# EAGLE board pcbdesign(test) (EAGLE 9.3.1)
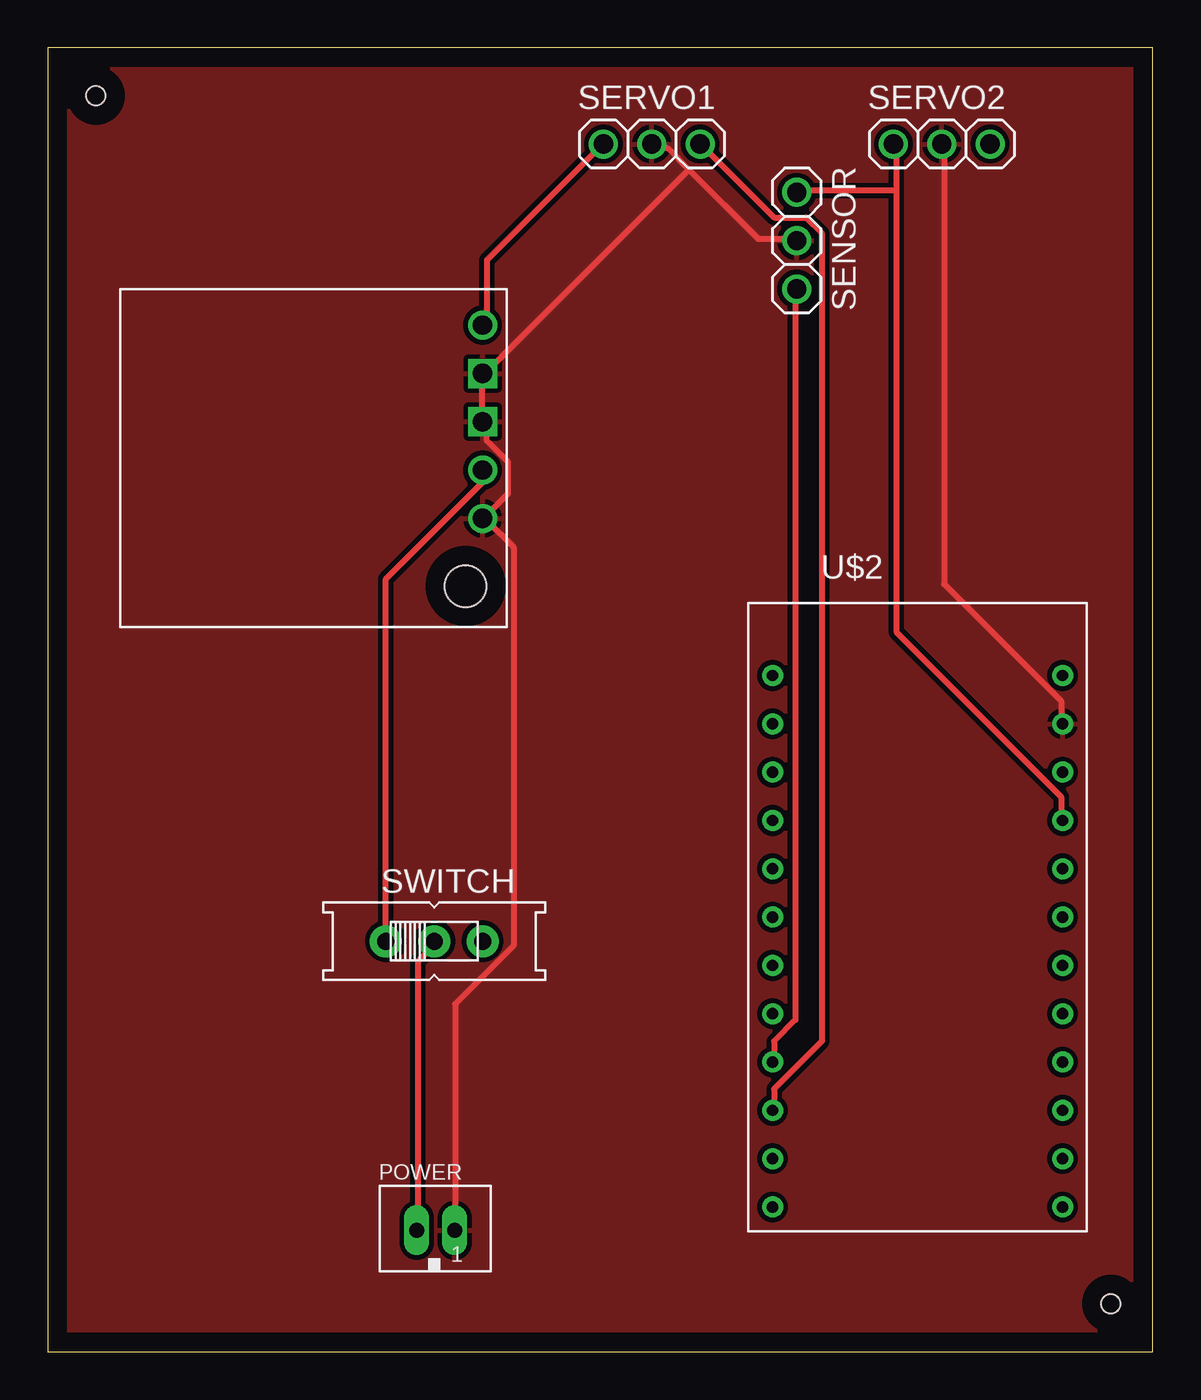
[diagram p0: board, top side]
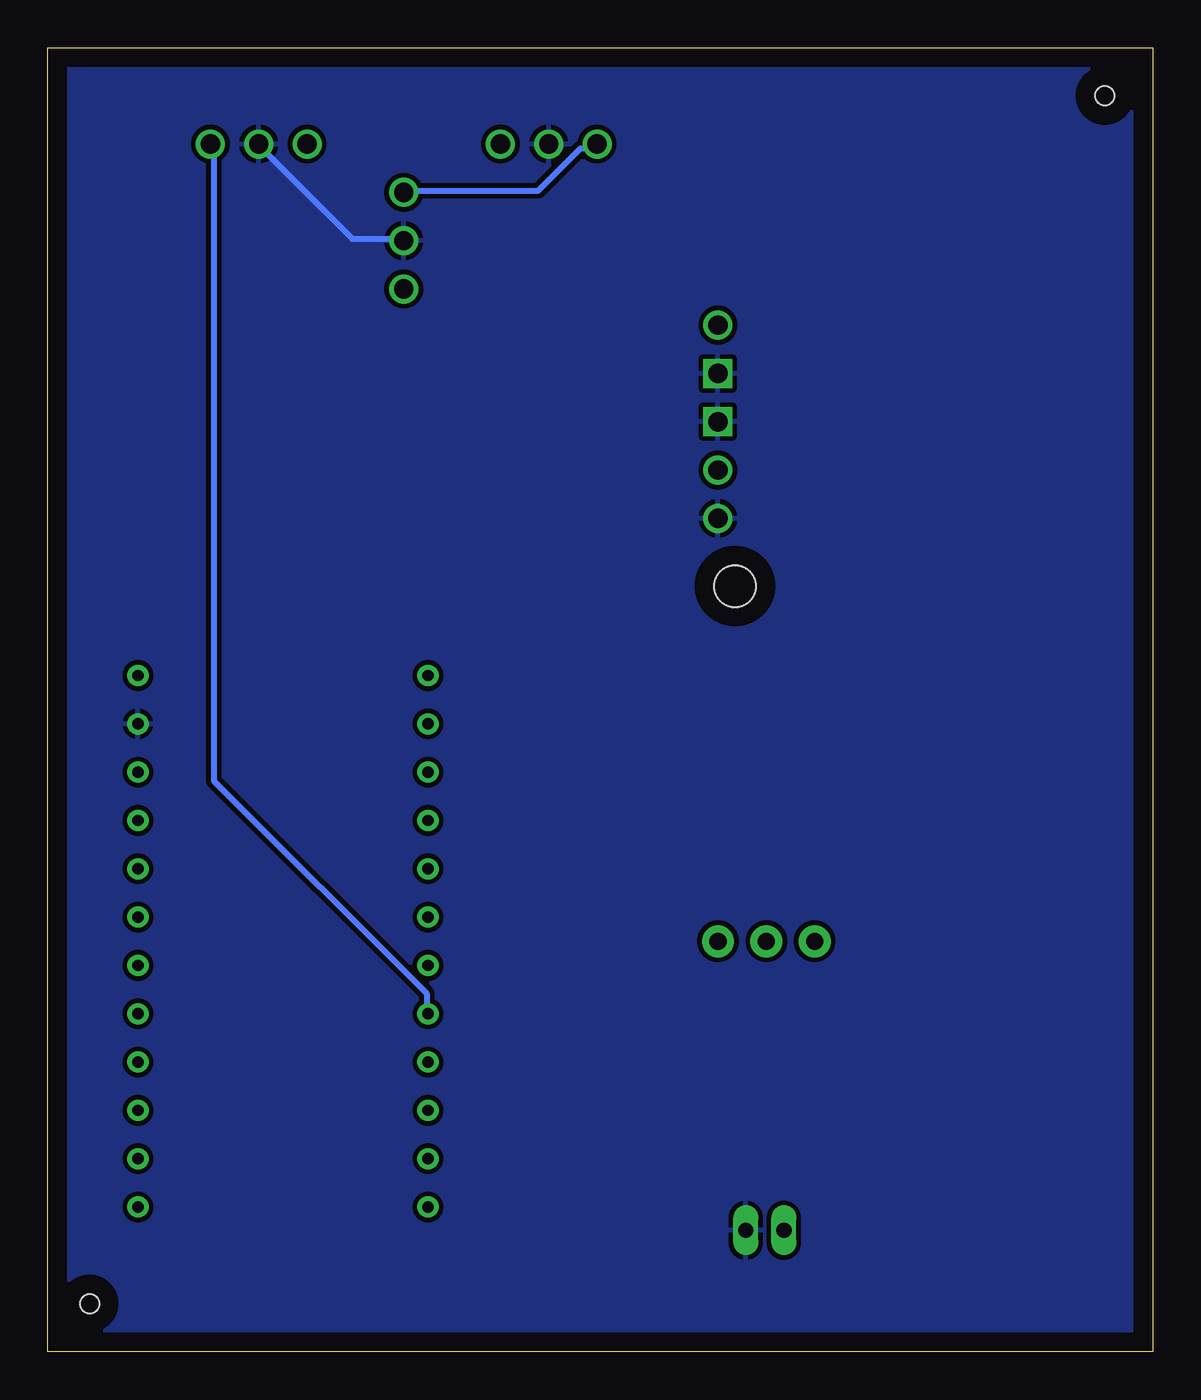
[diagram p1: board, bottom side, seen from below]

Size 58.09 x 68.57 mm. Coordinates in mm from the lower left corner, seen from the top.
Outline: 0,0 58.09,0 58.09,68.57 0,68.57 0,0
Copper layers (1*16): Top 0.035mm / dielectric 1.5mm / Bottom 0.035mm
Design rules "default": minimum track width 6mil, minimum drill 0.35mm, track to track 6mil, track to pad 6mil, pad to pad 6mil, via to via 6mil, smd to smd 6mil, copper to edge 40mil, drill to drill 6mil, minimum pad ring 10mil, minimum via ring 8mil, stop-mask expansion 4mil, vias tented up to drill 0mil, thermal gap 10mil
Net classes: 0 default: width 0.305 mm, drill 0.508 mm, clearance 0.254 mm
Holes 1 mm at 2.54,66.04 55.88,2.54

## Footprints (pad centres in the part's own frame; a part is rotated, then mirrored left to right if it is on the bottom)
JST_B2B-PH_HEADER = drill 0.8 long: P1 1.075,0.048; P2 -0.925,0.048
1X03 = drill 1.016: 1 -2.54,0; 2 0,0; 3 2.54,0
EG1218 = drill 0.9 pad 1.676: O -2.54,0; P 0,0; S 2.54,0
ARDUINO_PROMICRO = drill 0.6: 2 1.27,19.05; 3 1.27,16.51; 4 1.27,13.97; 5 1.27,11.43; 6 1.27,8.89; 7 1.27,6.35; 8 1.27,3.81; 9 1.27,1.27; 10 16.51,1.27; 14 16.51,6.35; 15 16.51,8.89; 16 16.51,3.81; A0 16.51,11.43; A1 16.51,13.97; A2 16.51,16.51; A3 16.51,19.05; GND 1.27,24.13; GND1 1.27,21.59; GND2 16.51,26.67; RAW 16.51,29.21; RST 16.51,24.13; RXI 1.27,26.67; TXO 1.27,29.21; VCC 16.51,21.59
REG15D = drill 1.016: EN 5.715,1.27; VIN 8.255,1.27; VOUT 15.875,1.27 | drill 1.016 square: GND 10.795,1.27; GND1 13.335,1.27 | hole 2.184: 2.159,2.159

## Placement (x,y rotation side)
POWER  JST-PH_2-PIN_HEADER  [JST_B2B-PH_HEADER]  20.32,6.35 0 top
SENSOR  [1X03]  39.37,58.42 270 top
SERVO1  [1X03]  31.75,63.5 0 top
SERVO2  [1X03]  46.99,63.5 0 top
SWITCH  [EG1218]  20.32,21.59 0 top
U$2  ARDUINO_PROMICRO  [ARDUINO_PROMICRO]  36.83,6.35 0 top
V_REGULATOR  5ASTEP-DOWNVOLTAGEREGULATOR  [REG15D]  24.13,38.1 90 top

## Library data of the parts
POWER = SRG
SENSOR SERVO1 SERVO2 SWITCH = adafruit
U$2 V_REGULATOR = oddWorld

## Nets
7.4V: POWER.P2 SWITCH.P
GND: POWER.P1 SENSOR.2 SERVO1.2 SERVO2.2 U$2.GND2 V_REGULATOR.EN V_REGULATOR.GND V_REGULATOR.GND1
N$1: SERVO2.3 U$2.5
N$2: SENSOR.3 U$2.6
N$3: SERVO1.3 U$2.7
N$4: SWITCH.O V_REGULATOR.VIN
VCC: SENSOR.1 SERVO1.1 SERVO2.1 U$2.VCC V_REGULATOR.VOUT

## Tracks (layer width: path | path; a pad name or v marks a point on that pad's centre or on a via)
7.4V
  Top 0.305: POWER.P2 19.46,6.55 19.46,20.52 20.3,21.36 SWITCH.P
GND
  Top 0.305: POWER.P1 21.41,6.55 21.41,18.29 24.49,21.36 24.49,42.32 23.09,43.71 V_REGULATOR.EN 23.09,43.99 24.21,45.11 24.21,46.79 23.09,47.9 23.09,48.74 V_REGULATOR.GND 22.81,49.02 22.81,51.26 V_REGULATOR.GND1 23.09,51.54 33.71,62.15 | U$2.GND2 53.26,33.1 53.26,34.21 47.12,40.36 47.12,63.27 SERVO2.2 | 33.71,62.15 37.34,58.52 39.27,58.52 SENSOR.2 | 33.71,62.15 32.59,63.27 31.98,63.27 SERVO1.2
  Bottom 0.305: SERVO2.2 46.84,63.27 42.09,58.52 39.47,58.52 SENSOR.2
  pour Top: 0,69.85 59.69,69.85 59.69,-1.27 -1.27,-1.27 -1.27,69.85
  pour Bottom: -1.27,69.85 59.69,69.85 59.69,-1.27 -1.27,-1.27
N$1
  Bottom 0.305: U$2.5 38.18,18.01 38.18,18.85 49.35,30.02 49.35,63.27 SERVO2.3
N$2
  Top 0.305: U$2.6 38.18,15.49 38.18,16.33 39.29,17.45 39.29,55.73 SENSOR.3
N$3
  Top 0.305: U$2.7 38.18,12.7 38.18,13.82 40.69,16.33 40.69,58.8 39.85,59.64 38.18,59.64 34.54,63.27 SERVO1.3
N$4
  Top 0.305: SWITCH.O 17.78,40.64 22.81,45.67 22.81,46.23 V_REGULATOR.VIN
VCC
  Top 0.305: V_REGULATOR.VOUT 23.09,54.05 23.09,57.4 28.96,63.27 SERVO1.1 | 44.6,61.04 44.6,63.27 SERVO2.1 | 44.6,61.04 44.6,37.85 53.26,29.18 53.26,28.07 U$2.VCC | 44.6,61.04 39.57,61.04 SENSOR.1
  Bottom 0.305: SERVO1.1 29.23,63.27 30.07,63.27 32.31,61.04 39.29,61.04 SENSOR.1